# Altium PCB Main.PcbDoc
Units mm, origin at the board's own origin, x right, y up, seen from the top; angles counter-clockwise.
Board outline 99 x 125 mm, 4 copper layers (Top Layer, Layer 1, Layer 2, Bottom Layer), stack 0.603 mm thick; 11 components, 86 nets, 216 pads, 11 vias.
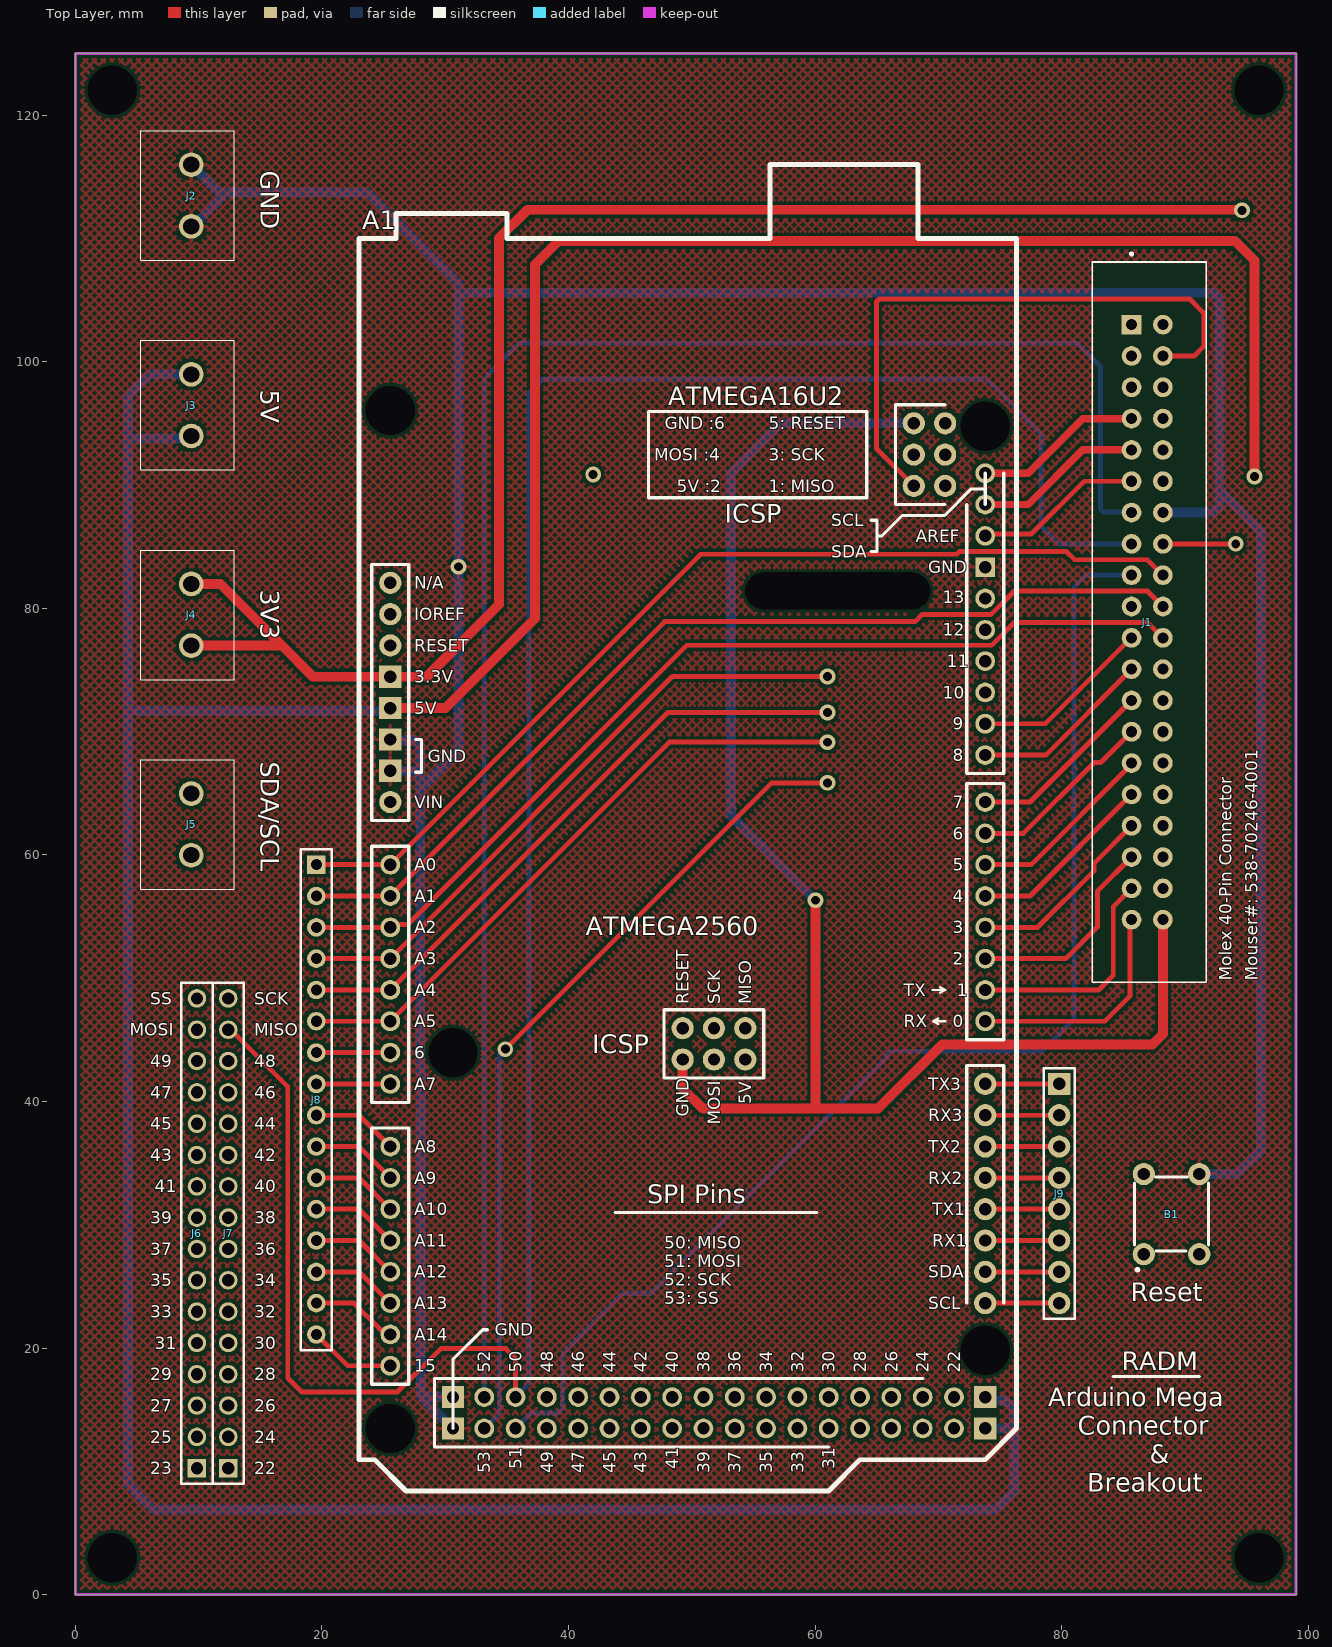
[diagram p0: Top Layer view]
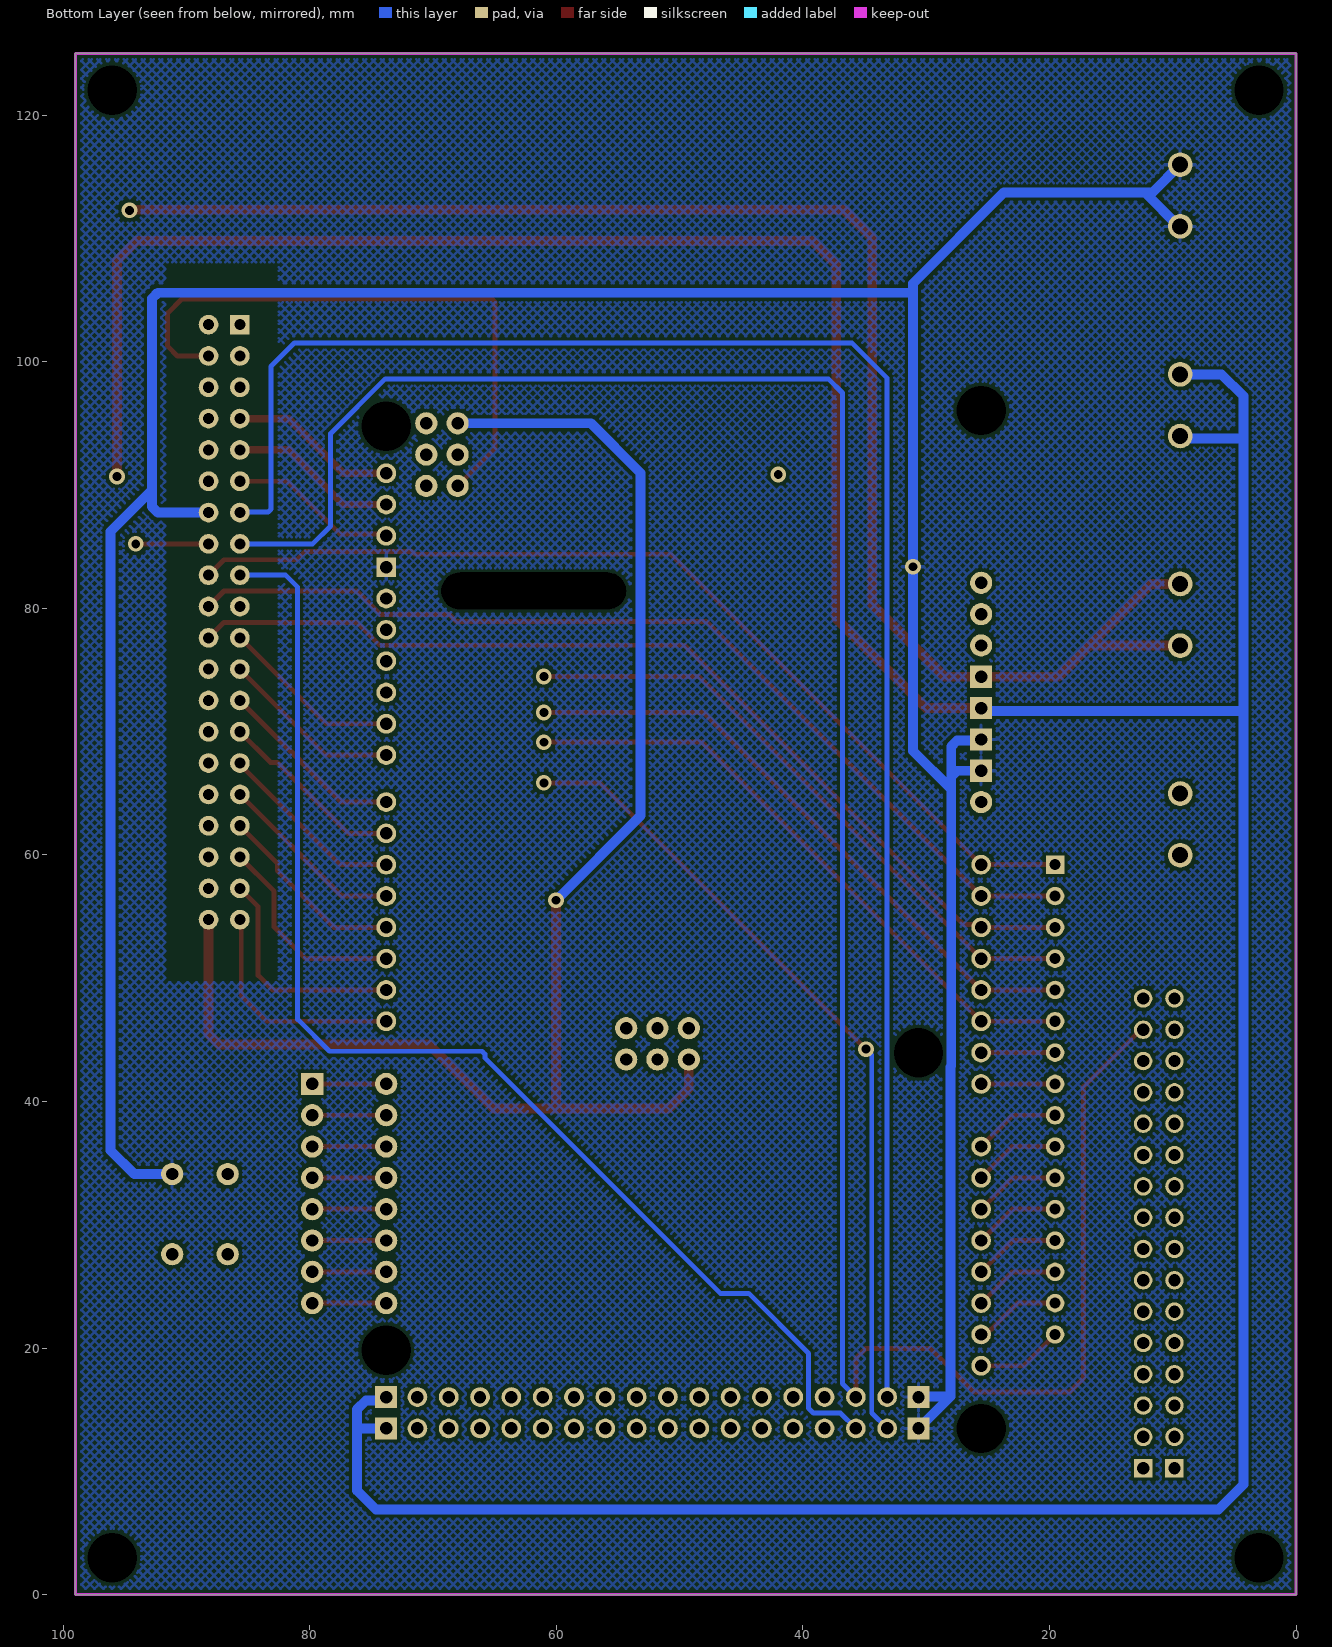
[diagram p1: Bottom Layer view, seen from below]
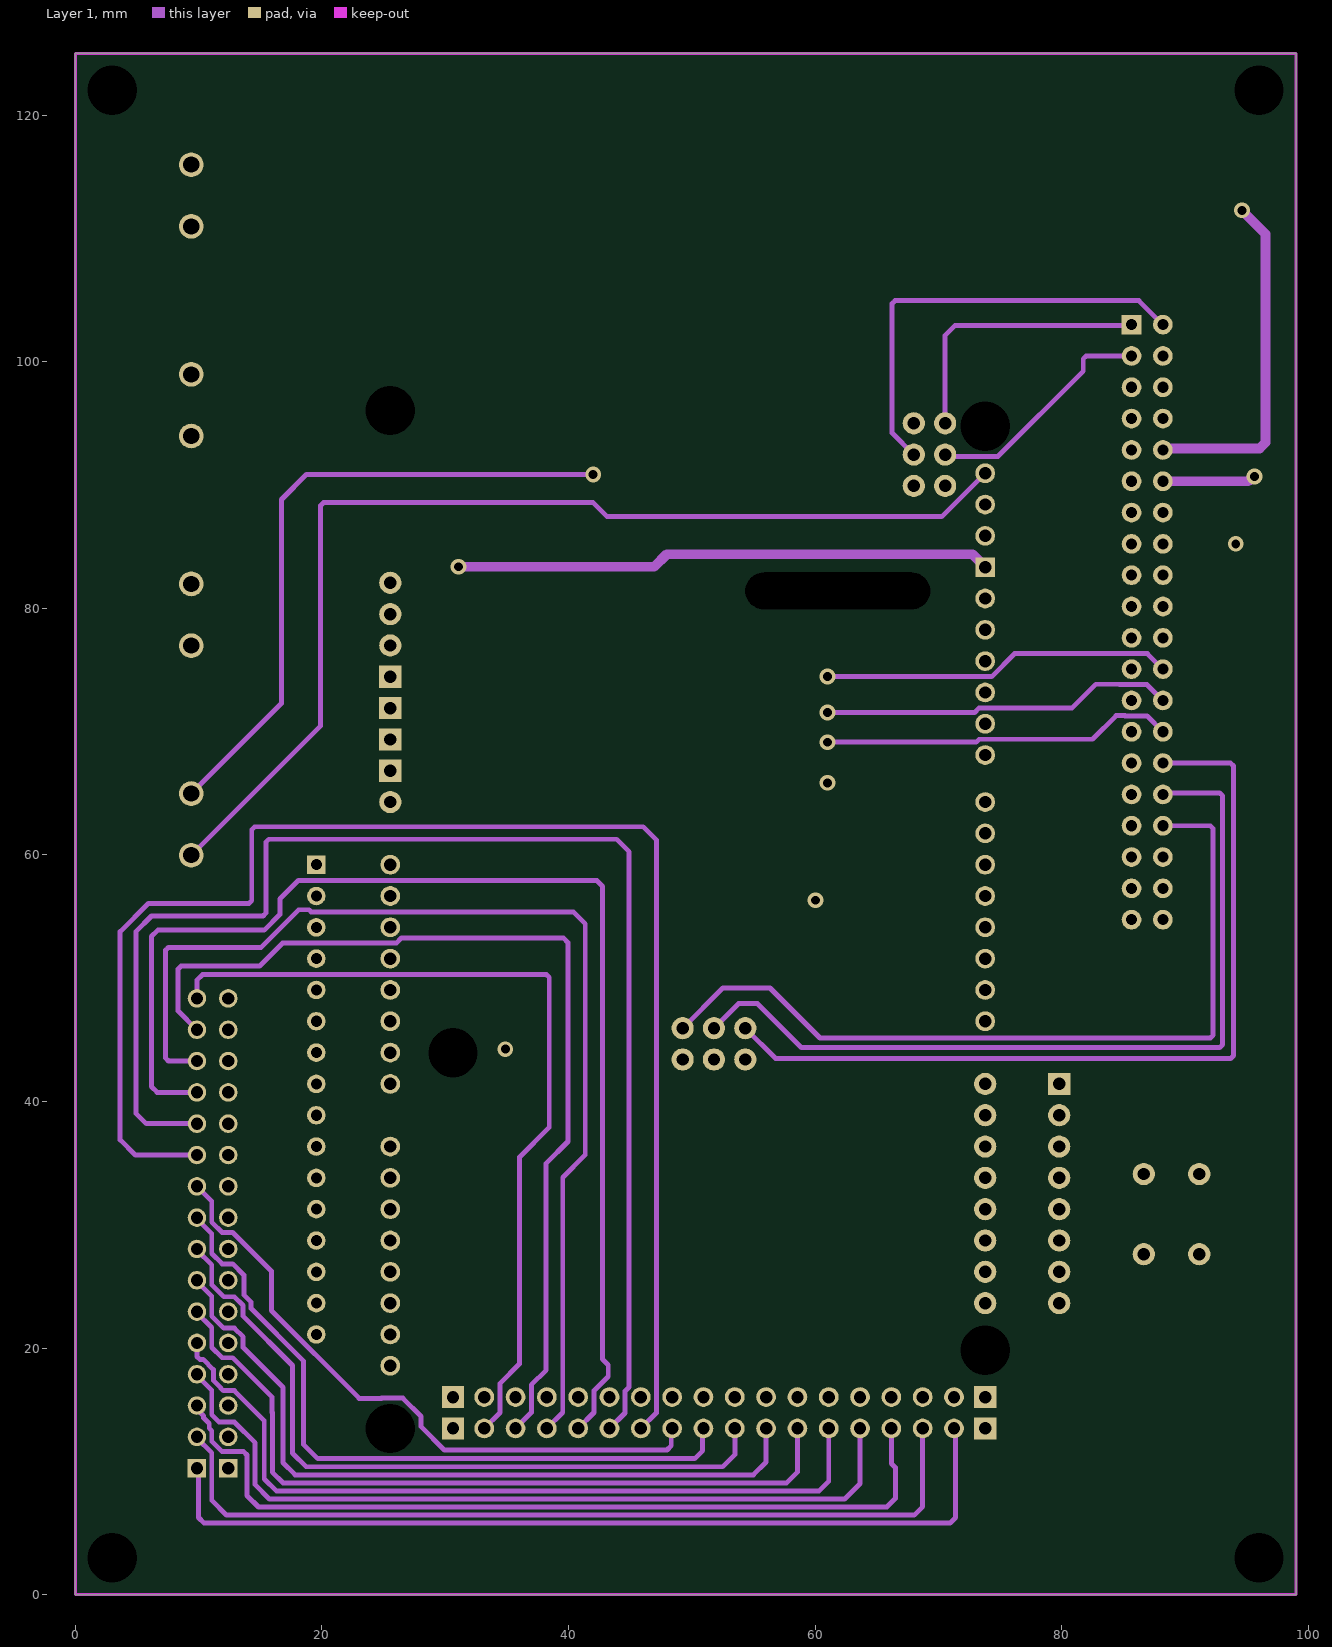
[diagram p2: Layer 1]
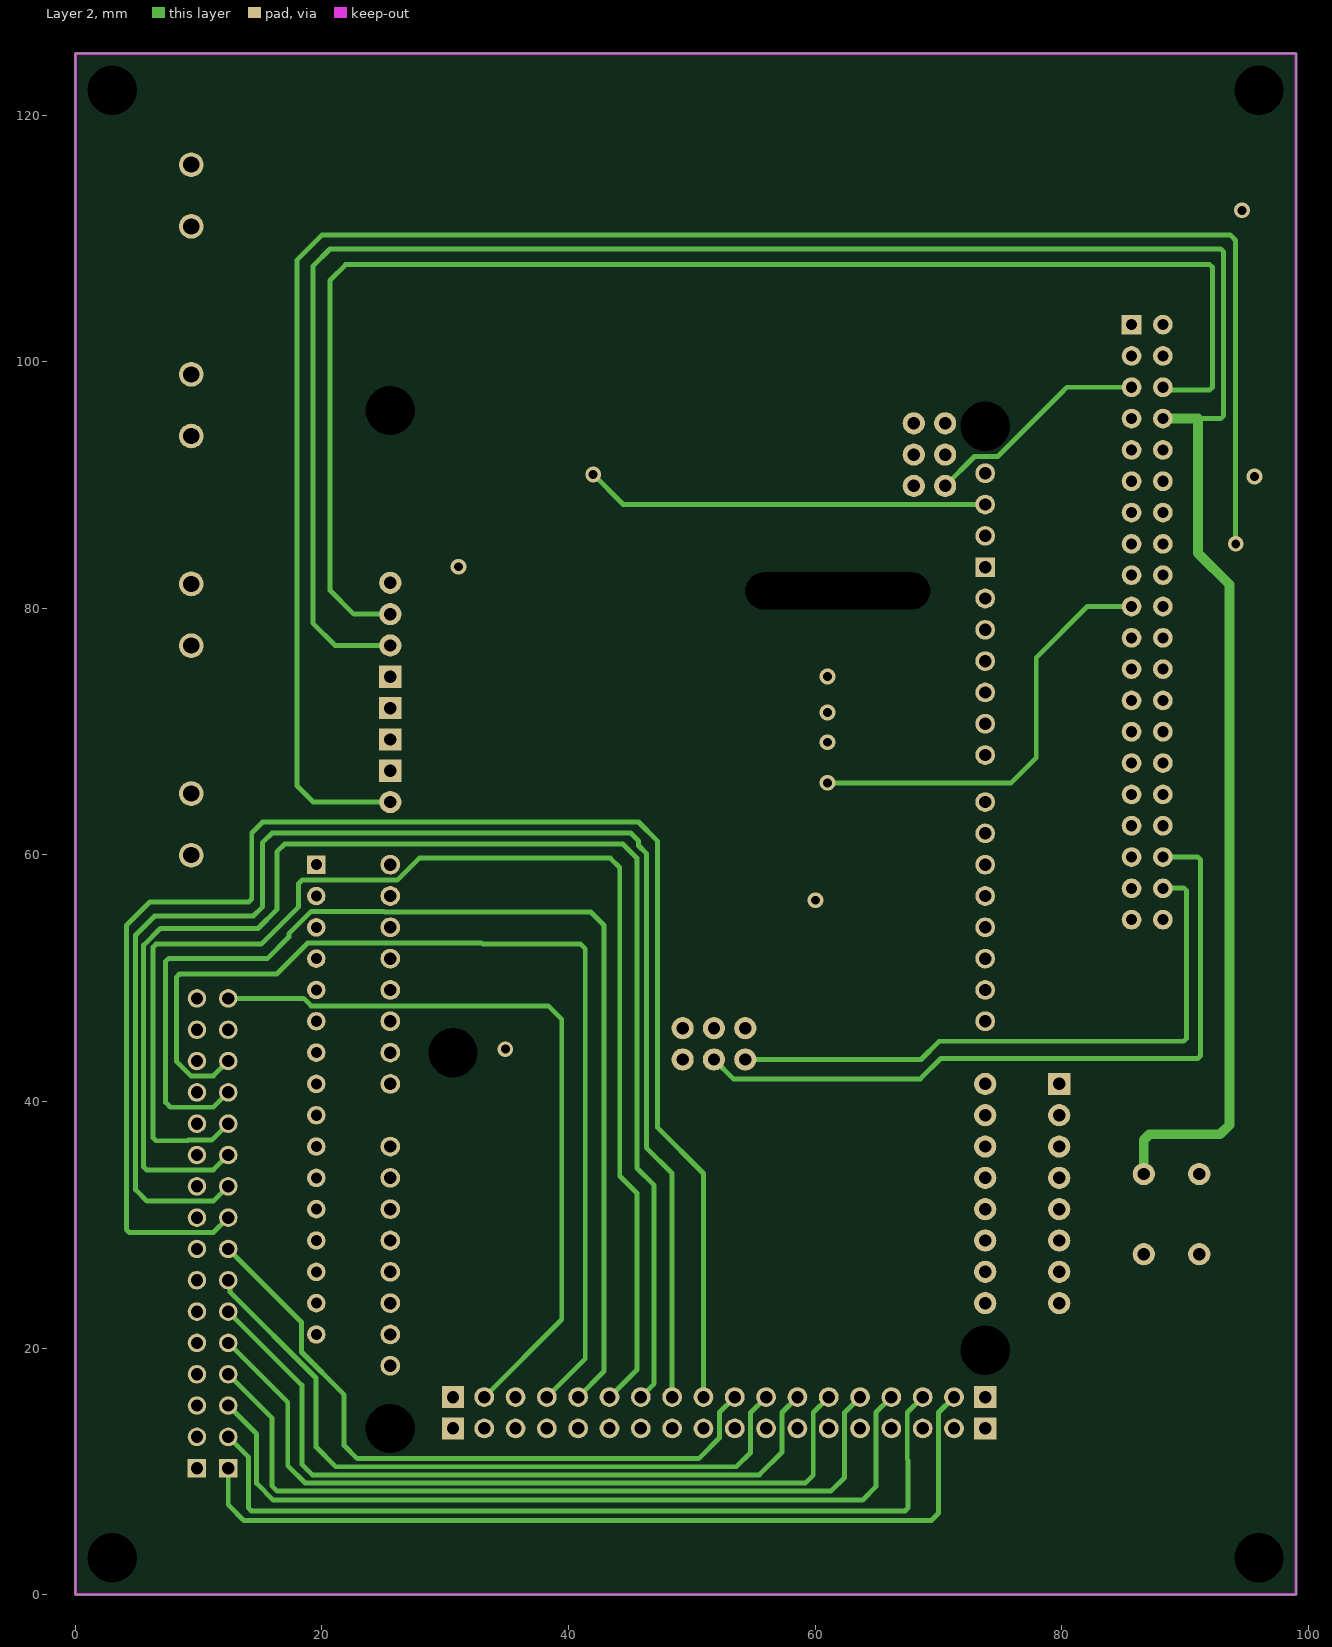
[diagram p3: Layer 2]

## Layer stack, top to bottom
Top Solder: solder mask 0.0102, Solder Resist, Dk 3.5
Top Layer: signal copper 0.0356
Dielectric 2: prepreg 0.0711, PP-006, Dk 4.1
Layer 1: signal copper 0.035
Dielectric 1: dielectric 0.32, FR-4, Dk 4.8
Layer 2: signal copper 0.035
Dielectric 3: prepreg 0.0711, PP-006, Dk 4.1
Bottom Layer: signal copper 0.0356
Bottom Solder: solder mask 0.0102, Solder Resist, Dk 3.5

## Board outline
0,0 0,125 99,125 99,0

## Design rules (kind name [scope] priority, off if disabled: settings)
Clearance Clearance_3 [(InComponent('J6') OR InComponent('J7'))] p1: gap=0.254 ignorepadtopadclearanceinfootprint=FALSE except(0: Arc-Hole Track-Hole SMDPad-Hole THPad-Hole Via-Hole Fill-Hole Poly-Hole Region-Hole Text-Hole)
Clearance Clearance_2 [All] p2: gap=0.254 ignorepadtopadclearanceinfootprint=FALSE except(0: Arc-Hole Track-Hole SMDPad-Hole THPad-Hole Via-Hole Fill-Hole Poly-Hole Region-Hole Text-Hole)
Clearance Clearance_1 [All] p3: gap=0.254 ignorepadtopadclearanceinfootprint=FALSE except(0: Arc-Hole Track-Hole SMDPad-Hole THPad-Hole Via-Hole Fill-Hole Poly-Hole Region-Hole Text-Hole)
Clearance [All] p4: gap=0.254 ignorepadtopadclearanceinfootprint=FALSE except(0: Arc-Hole Track-Hole SMDPad-Hole THPad-Hole Via-Hole Fill-Hole Poly-Hole Region-Hole Text-Hole)
PolygonConnect [All] p1: connectstyle=Relief reliefconductorwidth=0.254 reliefentries=4 polygonreliefangle="90 Angle" airgapwidth=0.254
RoutingVias [All] p1: holewidth=0.711 width=1.27 viastyle="Through Hole" minholewidth=0.711 minwidth=1.27 maxholewidth=0.711 maxwidth=1.27
SolderMaskExpansion [All] p1: expansion=0.102 istentingtop=FALSE
Width [All] p1: maxlimit=0.8 minlimit=0.4 preferedwidth=0.4
30 further rules are at their usual default settings.

## Components (designator, comment, footprint, x,y, rotation, side; value= is the part's Value field where it differs from the comment)
A1 "Arduino Mega R3" "Arduino Mega" 23,110 r0 top
B1 "Pushbutton" FSM4JH 88.9,30.861 r90 top
J1 "1-1761681-3" TE_1-1761681-3 85.659,103 r270 top
J2 "TB002-500-02BE" TB00250002BE 9.397,110.969 r90 top
J3 "TB002-500-02BE" TB00250002BE 9.397,93.969 r90 top
J4 "TB002-500-02BE" TB00250002BE 9.397,76.969 r90 top
J5 "TB002-500-02BE" TB00250002BE 9.397,59.969 r90 top
J6 "Header 16" HDR1X16#1 9.858,10.254 r90 top
J7 "Header 16" HDR1X16#1 12.398,10.254 r90 top
J8 "Header 16" HDR1X16#2 19.54,59.2 r270 top
J9 "Header 8" HDR1X8 79.79,41.42 r270 top

## Footprints (in the part's own frame and the unit in brackets; to place one, negate y for a bottom-side part, rotate by r counter-clockwise, add the part's x,y. Pads: shape width x height; smd on the part's side, far side on the other; paste and mask are expansions set on the pad)
"Arduino Mega" [mm]
  round 1.6 hole 1: 0(50.79,-63.5) 1(50.79,-60.96) 2(50.79,-58.42) 3(50.79,-55.88) 4(50.79,-53.34) 5(50.79,-50.8) 6(50.79,-48.26) 7(50.79,-45.72) 8(50.79,-41.91) 9(50.79,-39.37) 10(50.79,-36.83) 11(50.79,-34.29) 12(50.79,-31.75) 13(50.79,-29.21) 22(48.26,-93.98) 23(48.26,-96.52) 24(45.72,-93.98) 25(45.72,-96.52) 26(43.18,-93.98) 27(43.18,-96.52) 28(40.64,-93.98) 29(40.64,-96.52) 30(38.1,-93.98) 31(38.1,-96.52) 32(35.56,-93.98) 33(35.56,-96.52) 34(33.02,-93.98) 35(33.02,-96.52) 36(30.48,-93.98) 37(30.48,-96.52) 38(27.94,-93.98) 39(27.94,-96.52) 40(25.4,-93.98) 41(25.4,-96.52) 42(22.86,-93.98) 43(22.86,-96.52) 44(20.32,-93.98) 45(20.32,-96.52) 46(17.78,-93.98) 47(17.78,-96.52) 48(15.24,-93.98) 49(15.24,-96.52) 50(12.7,-93.98) 51(12.7,-96.52) 52(10.16,-93.98) 53(10.16,-96.52) A0(2.54,-50.8) A1(2.54,-53.34) A2(2.54,-55.88) A3(2.54,-58.42) A4(2.54,-60.96) A5(2.54,-63.5) A6(2.54,-66.04) A7(2.54,-68.58) A8(2.54,-73.66) A9(2.54,-76.2) A10(2.54,-78.74) A11(2.54,-81.28) A12(2.54,-83.82) A13(2.54,-86.36) A14(2.54,-88.9) A15(2.54,-91.44) AREF(50.79,-24.13) SCL(50.79,-19.05) SDA(50.79,-21.59)
  rect 1.8x1.8 hole 1: 3V3(2.54,-35.56) 5V1(2.54,-38.1) 5V2(50.8,-93.98) 5V3(50.8,-96.52) GND1(2.54,-40.64) GND2(2.54,-43.18) GND3(7.62,-93.98) GND4(7.62,-96.52)
  round 1.8 hole 1: 14TX3(50.79,-68.58) 15RX3(50.79,-71.12) 16TX2(50.79,-73.66) 17RX2(50.79,-76.2) 18TX1(50.79,-78.74) 19RX1(50.79,-81.28) 20SDA(50.79,-83.82) 21SCL(50.79,-86.36) 200(26.25,-66.6) 201(26.25,-64.06) 202(28.79,-66.6) 203(28.79,-64.06) 204(31.33,-66.6) 205(31.33,-64.06) 300(45,-15) 301(47.54,-15) 302(45,-17.54) 303(47.54,-17.54) 304(45,-20.08) 305(47.54,-20.08) IOREF(2.54,-30.48) NA(2.54,-27.94) RESET(2.54,-33.02) VIN(2.54,-45.72)
  round 1.524 hole 4 unplated: 211(2.54,-96.52) 211(2.54,-13.97) 211(7.62,-66.04) 211(50.8,-90.17) 211(50.8,-15.24)
  rect 1.6x1.6 hole 1: GND5(50.79,-26.67)
  oval 14x1.524 hole 3 slot 15 at 0 deg unplated: LED(38.83,-28.6)
  silkscreen extent 0,-101.6 53.33,6
FSM4JH [mm]
  round 1.8 hole 1: 1(-3.25,2.25) 2(3.25,2.25) 3(-3.25,-2.25) 4(3.25,-2.25)
  silkscreen extent -4.6,-3 3,3, body extent -3.82,-3 3.98,3, height 7.61
HDR1X8 [mm] "Connector; Header; 8 Position"
  rect 1.8x1.8 hole 1: 1(0,0)
  round 1.8 hole 1: 2(2.54,0) 3(5.08,0) 4(7.62,0) 5(10.16,0) 6(12.7,0) 7(15.24,0) 8(17.78,0)
  silkscreen extent -1.27,-1.27 19.05,1.27
HDR1X16#1 [mm] "Connector; Header; 16 Position"
  rect 1.5x1.5 hole 1: 1(0,0)
  round 1.5 hole 1: 2(2.54,0) 3(5.08,0) 4(7.62,0) 5(10.16,0) 6(12.7,0) 7(15.24,0) 8(17.78,0) 9(20.32,0) 10(22.86,0) 11(25.4,0) 12(27.94,0) 13(30.48,0) 14(33.02,0) 15(35.56,0) 16(38.1,0)
  silkscreen extent -1.27,-1.27 39.37,1.27
HDR1X16#2 [mm] "Connector; Header; 16 Position"
  rect 1.5x1.5 hole 0.9: 1(0,0)
  round 1.5 hole 0.9: 2(2.54,0) 3(5.08,0) 4(7.62,0) 5(10.16,0) 6(12.7,0) 7(15.24,0) 8(17.78,0) 9(20.32,0) 10(22.86,0) 11(25.4,0) 12(27.94,0) 13(30.48,0) 14(33.02,0) 15(35.56,0) 16(38.1,0)
  silkscreen extent -1.27,-1.27 39.37,1.27
TB00250002BE [mm]
  round 2 hole 1.3: 1(0,0) 2(5,0)
  silkscreen extent -2.75,-3.5 7.75,4.1, body extent -2.51,-4.08 7.99,3.52, height 9.99
TE_1-1761681-3 [mm]
  rect 1.6x1.6 hole 0.9: 1(0,0)
  round 1.6 hole 0.9: 2(0,2.54) 3(2.54,0) 4(2.54,2.54) 5(5.08,0) 6(5.08,2.54) 7(7.62,0) 8(7.62,2.54) 9(10.16,0) 10(10.16,2.54) 11(12.7,0) 12(12.7,2.54) 13(15.24,0) 14(15.24,2.54) 15(17.78,0) 16(17.78,2.54) 17(20.32,0) 18(20.32,2.54) 19(22.86,0) 20(22.86,2.54) 21(25.4,0) 22(25.4,2.54) 23(27.94,0) 24(27.94,2.54) 25(30.48,0) 26(30.48,2.54) 27(33.02,0) 28(33.02,2.54) 29(35.56,0) 30(35.56,2.54) 31(38.1,0) 32(38.1,2.54) 33(40.64,0) 34(40.64,2.54) 35(43.18,0) 36(43.18,2.54) 37(45.72,0) 38(45.72,2.54) 39(48.26,0) 40(48.26,2.54)
  silkscreen extent -5.83,-3.18 53.34,6.04

## Part data
A1: library part "Arduino Mega"
B1: "Switch", Manufacturer_Name="TE Connectivity", Manufacturer_Part_Number=FSM2JAH, Mouser Part Number=506-FSM2JAH, Datasheet Link=http://www.te.com/commerce/DocumentDelivery/DDEController?Action=showdoc&DocId=Customer+Drawing%7F1825910%7FC9%7Fpdf%7FEnglish%7FENG_CD_1825910_C9.pdf%7F1825910-3, Mouser Price/Stock=https://www.mouser.co.uk/ProductDetail/TE-Connectivity-PB/FSM2JAH?qs=Of7OaoM7rsH02ckr%252BGLHNA%3D%3D
J1: "Mouser#: 538-70246-4001 / Mfr#: 70246-4001 / MOLEX 40 Pin Connector / https://www.mouser.com/ProductDetail/Molex/70246-4001?qs=L7RdmAxh%252BcPPhnZkdmvwrw%3D%3D", Package=None, Availability=Unavailable, MP=1-1761681-3, Price=None
J2 J3 J4 J5: "Connector", Manufacturer_Name="CUI Devices", Mouser Part Number=490-TB002-500-02BE, Arrow Part Number=TB002-500-02BE, Arrow Price/Stock=https://www.arrow.com/en/products/tb002-500-02be/cui-devices?region=nac, Datasheet Link=https://eu.mouser.com/datasheet/2/670/tb002_500-1550579.pdf, Height=10.4mm, Manufacturer_Part_Number=TB002-500-02BE, Mouser Price/Stock=https://www.mouser.co.uk/ProductDetail/CUI-Devices/TB002-500-02BE?qs=vLWxofP3U2x9716kcgva%2Fw%3D%3D
J6 J7 J8: "Header, 16-Pin", LatestRevisionDate=17-Jul-2002, LatestRevisionNote="Re-released for DXP Platform.", Publisher="Altium Limited"
J9: "Header, 8-Pin", LatestRevisionDate=17-Jul-2002, LatestRevisionNote="Re-released for DXP Platform.", Publisher="Altium Limited"

## Free pads (board coordinates)
  round 1.524 hole 4 unplated: 2(3,3) 2(3,122) 2(96,3) 2(96,122)

## Via types
v1: diameter 1.27, hole 0.711, Top Layer to Bottom Layer, 11 vias

## Nets (pads, with @x,y where several pads share a name; then routed paths per layer and width w, separated by ;. In a path a pad name is that pad's centre, name@x,y a point inside that pad or via, vN(x,y) a via of type N, cw(c..) or ccw(c..) an arc to the next point about the centre after c; other vN are vias at no path point)
0: A1.0 J1.39 | length 18.7
  Top Layer w0.4: A1.0 83.489,46.5 85.55,48.561 J1.39@85.55,54.631
1: A1.1 J1.37 | length 18.5
  Top Layer w0.4: A1.1 82.988,49.04 84.175,50.227 84.175,55.797 J1.37
2: A1.2 J1.35 | length 17
  Top Layer w0.4: A1.2 80.314,51.58 82.883,54.149 82.883,57.044 J1.35
3: A1.3 J1.33 | length 15.6
  Top Layer w0.4: A1.3 78.028,54.12 82.629,58.721 82.629,59.33 J1.33
3V3: A1.3V3 J1.10 J4.1 J4.2 | length 157
  Top Layer w0.4: 16.676,76.969 16.716,77.009
  Top Layer w0.8: J4.1 16.676,76.969 ; J4.2 11.756,81.969 16.716,77.009 19.285,74.44 A1.3V3 28.498,74.44 34.369,80.311 34.369,110.029 36.655,112.315 94.568,112.315 v1(94.615,112.268)
  Layer 1 w0.4: J1.10 J1.10@88.323,92.964
  Layer 1 w0.8: J1.10@88.323,92.964 96.051,92.964 96.52,93.433 96.52,110.363 v1(94.615,112.268)
4: A1.4 J1.31 | length 15.3
  Top Layer w0.4: A1.4 77.419,56.66 J1.31
5: A1.5 J1.29 | length 15.3
  Top Layer w0.254: J1.29@85.659,67.339 J1.29
  Top Layer w0.4: A1.5 77.52,59.2 J1.29@85.659,67.339
5V: A1.5V1 A1.5V2 A1.5V3 J1.12 J3.1 J3.2 | length 334.2
  Top Layer w0.8: A1.5V1 30.022,71.9 37.29,79.168 37.29,107.87 39.195,109.775 94.051,109.775 95.631,108.195 v1(95.631,90.678)
  Layer 1 w0.8: J1.12 95.126,90.3 95.504,90.678 v1(95.631,90.678)
  Bottom Layer w0.8: J3.1 9.201,93.773 4.27,93.773 ; J3.2 6.037,98.969 4.27,97.202 4.27,93.773 ; A1.5V1 25.315,71.675 4.27,71.675 ; A1.5V3 76.054,13.48 76.152,13.382 ; A1.5V2 74.066,15.754 75.431,15.754 76.152,15.033 76.152,13.382 ; 4.27,71.675 4.27,8.937 6.302,6.905 74.628,6.905 76.152,8.429 76.152,13.382 ; 4.27,71.675 4.27,93.773
6: A1.6 J1.27 | length 15.3
  Top Layer w0.4: A1.6 76.885,61.74 82.629,67.484 83.163,67.484 J1.27
7: A1.7 J1.25 | length 15.3
  Top Layer w0.4: A1.7 77.419,64.28 J1.25
8: A1.8 J1.23 | length 14.8
  Top Layer w0.4: A1.8 78.689,68.09 J1.23
9: A1.9 J1.21 | length 14.8
  Top Layer w0.254: J1.21@85.633,77.6 J1.21
  Top Layer w0.4: A1.9 78.663,70.63 J1.21@85.633,77.6
14: A1.14TX3 J9.1 | length 6
  Top Layer w0.4: A1.14TX3 J9.1
15: A1.15RX3 J9.2 | length 6
  Top Layer w0.4: A1.15RX3 J9.2
16: A1.16TX2 J9.3 | length 6
  Top Layer w0.4: A1.16TX2 J9.3
17: A1.17RX2 J9.4 | length 6
  Top Layer w0.4: A1.17RX2 J9.4
18: A1.18TX1 J9.5 | length 6
  Top Layer w0.4: A1.18TX1 J9.5
19: A1.19RX1 J9.6 | length 6
  Top Layer w0.4: A1.19RX1 J9.6
20: A1.20SDA J9.7 | length 6
  Top Layer w0.4: A1.20SDA J9.7
21: A1.21SCL J9.8 | length 6
  Top Layer w0.4: A1.21SCL J9.8
22: A1.22 J7.1 | length 71.3
  Layer 2 w0.4: J7.1 12.398,7.286 13.668,6.016 69.421,6.016 70.006,6.601 70.006,14.766 A1.22
23: A1.23 J6.1 | length 73.1
  Layer 1 w0.4: J6.1 9.985,10.127 9.985,6.25 10.441,5.794 70.939,5.794 71.395,6.25 71.395,13.345 A1.23
24: A1.24 J7.2 | length 69.7
  Layer 2 w0.4: J7.2 14.049,11.143 14.049,7.012 14.283,6.778 67.282,6.778 67.516,7.012 67.516,10.892 67.466,10.942 67.466,14.766 A1.24
25: A1.25 J6.2 | length 70.4
  Layer 1 w0.4: J6.2 9.858,12.706 11.062,11.502 11.062,7.644 12.258,6.448 68.029,6.448 68.72,7.139 A1.25
26: A1.26 J7.3 | length 66.3
  Layer 2 w0.4: J7.3 14.703,13.029 14.703,9.025 16.061,7.667 63.833,7.667 64.926,8.76 64.926,14.766 A1.26
27: A1.27 J6.3 | length 69.1
  Layer 1 w0.4: J6.3 9.858,15.036 10.408,14.486 10.408,14.32 10.855,13.873 10.855,13.5 11.062,13.293 11.062,12.427 11.899,11.59 13.654,11.59 13.922,11.322 13.922,8.028 14.848,7.102 65.809,7.102 66.5,7.793 66.5,10.314 66.18,10.634 A1.27
28: A1.28 J7.4 | length 64.6
  Layer 2 w0.4: J7.4 15.954,14.318 15.954,8.79 16.334,8.41 61.294,8.41 62.386,9.502 62.386,14.766 A1.28
29: A1.29 J6.4 | length 66.2
  Layer 1 w0.4: J6.4 9.858,17.786 11.062,16.582 11.062,14.591 11.509,14.143 11.655,13.998 12.897,13.998 14.576,12.319 14.576,8.918 15.738,7.756 62.398,7.756 63.64,8.998 A1.29
30: A1.30 J7.5 | length 62.3
  Layer 2 w0.4: J7.5 17.224,15.588 17.224,10.461 18.621,9.064 59.231,9.064 59.846,9.679 59.846,14.766 A1.30
31: A1.31 J6.5 | length 64.8
  Layer 1 w0.4: J6.5 9.858,19.312 10.092,19.078 10.357,19.078 11.194,18.241 11.194,17.375 11.763,16.806 11.763,16.791 12.016,16.538 12.897,16.538 15.319,14.116 15.319,9.38 16.289,8.41 60.32,8.41 61.1,9.19 A1.31
32: A1.32 J7.6 | length 59.9
  Layer 2 w0.4: J7.6 18.367,16.985 18.367,10.568 19.217,9.718 55.47,9.718 57.306,11.554 57.306,14.766 A1.32
33: A1.33 J6.6 | length 62.9
  Layer 1 w0.4: J6.6 9.858,22.866 11.062,21.662 11.062,20.047 11.899,19.21 12.765,19.21 15.954,16.021 15.954,14.779 15.973,14.76 15.973,9.933 16.842,9.064 57.691,9.064 58.56,9.933 A1.33
34: A1.34 J7.7 | length 57.9
  Layer 2 w0.4: J7.7 12.548,25.344 12.548,24.535 19.51,17.573 19.51,11.985 21.123,10.372 53.611,10.372 54.766,11.527 54.766,14.766 A1.34
35: A1.35 J6.7 | length 60.9
  Layer 1 w0.4: J6.7 9.858,25.406 11.062,24.202 11.062,22.587 12.031,21.618 12.897,21.618 13.602,20.913 13.602,20.047 16.843,16.806 16.843,10.695 17.82,9.718 54.982,9.718 56.02,10.756 A1.35
36: A1.36 J7.8 | length 55.2
  Layer 2 w0.4: J7.8 18.336,22.096 18.336,19.672 21.796,16.212 21.796,12.092 22.862,11.026 50.555,11.026 52.226,12.697 52.226,14.766 A1.36
37: A1.37 J6.8 | length 59.1
  Layer 1 w0.4: J6.8 9.858,27.946 11.062,26.742 11.062,25.127 12.031,24.158 12.897,24.158 13.602,23.453 13.602,22.587 17.605,18.584 17.605,11.477 18.71,10.372 52.503,10.372 53.48,11.349 A1.37
38: A1.38 J7.9 | length 130.5
  Layer 2 w0.4: J7.9 11.194,29.37 4.377,29.37 4.143,29.604 4.143,54.276 6.048,56.181 14.069,56.181 14.303,56.415 14.303,61.769 15.192,62.658 45.672,62.658 47.196,61.134 47.196,37.893 50.94,34.149 A1.38
39: A1.39 J6.9 | length 57.4
  Layer 1 w0.4: J6.9 9.858,30.486 11.062,29.282 11.062,27.667 11.899,26.83 12.765,26.83 13.668,25.927 13.668,24.312 14.256,23.724 14.256,23.208 18.494,18.97 18.494,12.188 19.656,11.026 50.225,11.026 50.879,11.68 50.879,13.419 A1.39
40: A1.40 J7.10 | length 122.8
  Layer 2 w0.4: J7.10 11.194,31.91 5.808,31.91 4.886,32.832 4.886,53.495 6.429,55.038 14.43,55.038 15.192,55.8 15.192,61.007 15.954,61.769 45.037,61.769 45.672,61.134 45.672,60.753 46.307,60.118 46.307,36.242 48.4,34.149 A1.40
41: A1.41 J6.10 | length 52.3
  Layer 1 w0.4: J6.10 11.062,31.91 11.062,30.207 11.899,29.37 12.765,29.37 15.903,26.232 15.903,23.034 23.015,15.922 24.832,15.922 24.844,15.934 26.556,15.934 28.044,14.446 28.044,13.614 29.927,11.731 47.978,11.731 48.327,12.08 48.327,13.407 A1.41
42: A1.42 J7.11 | length 116.8
  Layer 2 w0.4: J7.11 11.194,34.45 5.774,34.45 5.54,34.684 5.54,52.681 6.881,54.022 14.811,54.022 16.335,55.546 16.335,60.245 16.97,60.88 44.402,60.88 45.545,59.737 45.545,34.591 46.942,33.194 46.942,17.102 A1.42
43: A1.43 J6.11 | length 123
  Layer 1 w0.4: J6.11@9.858,35.356 J6.11 4.858,35.654 3.635,36.877 3.635,53.768 5.921,56.054 14.069,56.054 14.303,56.288 14.303,62.043 14.537,62.277 46.053,62.277 47.114,61.216 47.114,14.734 A1.43
44: A1.44 J7.12 | length 109
  Layer 2 w0.4: J7.12 11.062,36.858 9.183,36.858 9.133,36.808 6.536,36.808 6.302,37.042 6.302,52.518 6.536,52.752 15.065,52.752 18.113,55.8 18.113,57.679 18.38,57.946 26.101,57.946 27.892,59.737 43.386,59.737 44.148,58.975 44.148,33.956 45.545,32.559 45.545,18.245 A1.44
45: A1.45 J6.12 | length 114.7
  Layer 1 w0.4: J6.12 5.747,38.194 4.905,39.036 4.905,53.768 6.175,55.038 15.212,55.038 15.446,55.272 15.446,61.027 15.68,61.261 43.894,61.261 44.91,60.245 44.91,16.843 44.574,16.507 44.574,14.734 A1.45 A1.45@43.32,13.805
46: A1.46 J7.13 | length 94.2
  Layer 2 w0.4: J7.13 11.194,39.53 7.713,39.53 7.318,39.925 7.318,51.355 7.572,51.609 15.593,51.609 17.317,53.333 17.317,53.6 19.136,55.419 25.008,55.419 25.053,55.374 41.78,55.374 42.878,54.276 42.878,18.118 A1.46
47: A1.47 J6.13 | length 100.6
  Layer 1 w0.4: J6.13 6.636,40.734 6.175,41.195 6.175,53.387 6.683,53.895 15.319,53.895 16.591,55.167 16.591,56.43 18.075,57.914 42.288,57.914 42.751,57.451 42.751,19.097 43.22,18.628 43.22,17.694 42.066,16.539 42.066,14.766 A1.47
48: A1.48 J7.14 | length 84.2
  Layer 2 w0.4: J7.14 11.194,42.07 9.359,42.07 8.207,43.222 8.207,50.105 8.441,50.339 16.335,50.339 18.83,52.834 32.956,52.834 33.038,52.752 40.973,52.752 41.354,52.371 41.354,19.134 A1.48
49: A1.49 J6.14 | length 89.5
  Layer 1 w0.4: J6.14 7.552,43.274 7.318,43.508 7.318,52.264 7.552,52.498 15.065,52.498 18.113,55.546 18.951,55.546 19.123,55.374 40.383,55.374 41.354,54.403 41.354,35.661 39.526,33.833 39.526,14.766 A1.49
201: A1.201 J1.34 | length 67.1
  Layer 1 w0.4: A1.201 52.506,49.196 56.34,49.196 60.39,45.146 92.047,45.146 92.281,45.38 92.281,62.126 92.047,62.36 J1.34
202: A1.202 J1.36 | length 59.9
  Layer 2 w0.4: A1.202 53.36,41.83 68.532,41.83 70.183,43.481 91.031,43.481 91.265,43.715 91.265,59.586 91.031,59.82 J1.36
203: A1.203 J1.32 | length 68.8
  Layer 1 w0.4: A1.203 53.776,47.926 55.324,47.926 58.88,44.37 92.809,44.37 93.043,44.604 93.043,64.779 92.809,65.013 88.312,65.013 J1.32
204: A1.204 J1.38 | length 50.5
  Layer 2 w0.4: A1.204 68.578,43.4 70.056,44.878 89.888,44.878 90.122,45.112 90.122,57.09 89.888,57.324 88.243,57.324 J1.38
205: A1.205 J1.30 | length 70
  Layer 1 w0.4: A1.205 56.789,43.481 93.698,43.481 93.932,43.715 93.932,67.206 93.698,67.44 J1.30
301: A1.301 J1.1 | length 22.6
  Layer 1 w0.4: A1.301 70.54,102.131 71.326,102.917 85.576,102.917 J1.1
302: A1.302 J1.2 | length 35.8
  Layer 1 w0.4: A1.302 66.246,94.214 66.246,104.715 66.48,104.949 86.249,104.949 J1.2
303: A1.303 J1.3 | length 19.1
  Layer 1 w0.4: A1.303 70.694,92.306 74.816,92.306 81.74,99.23 81.74,100.226 81.974,100.46 J1.3
304: A1.304 J1.4 | length 49.6
  Top Layer w0.4: A1.304 64.976,92.944 64.976,104.842 65.21,105.076 90.376,105.076 91.519,103.933 91.519,101.246 90.733,100.46 J1.4
305: A1.305 J1.5 | length 18.4
  Layer 2 w0.4: A1.305 72.924,92.304 74.814,92.304 80.089,97.579 80.089,97.603 80.406,97.92 J1.5
A0: A1.A0 J1.18 J8.1 | length 80
  Top Layer w0.4: J8.1 A1.A0 50.715,84.375 71.487,84.375 71.696,84.584 80.388,84.584 81.038,83.934 86.944,83.934 J1.18
A1: A1.A1 J1.20 J8.2 | length 79.4
  Top Layer w0.4: J8.2 A1.A1 47.794,78.914 68.107,78.914 68.697,79.504 74.277,79.504 76.167,81.394 86.944,81.394 J1.20
A2: A1.A2 J1.22 J8.3 | length 79.4
  Top Layer w0.4: J8.3 A1.A2 25.76,54.34 26.94,54.34 49.596,76.996 74.309,76.996 76.167,78.854 86.944,78.854 J1.22
A3: A1.A3 J1.24 J8.4 | length 79.9
  Top Layer w0.4: J8.4 A1.A3 48.429,74.469 v1(61,74.469) v1@61.42,74.469
  Layer 1 w0.4: v1(61,74.469) 61.013,74.456 74.309,74.456 76.167,76.314 86.944,76.314 J1.24
A4: A1.A4 J1.26 J8.5 | length 79.5
  Top Layer w0.4: J8.5 A1.A4 48.048,71.548 v1(61,71.548)
  Layer 1 w0.4: v1(61,71.548) 72.935,71.548 73.303,71.916 80.838,71.916 82.756,73.834 84.658,73.834 84.686,73.806 86.913,73.806 J1.26
A5: A1.A5 J1.28 J8.6 | length 79.5
  Top Layer w0.4: J8.6 A1.A5 48.175,69.135 v1(61,69.135)
  Layer 1 w0.4: v1(61,69.135) 73.062,69.135 73.303,69.376 82.489,69.376 84.407,71.294 85.111,71.294 85.139,71.266 86.913,71.266 J1.28
A6: A1.A6 J8.7 | length 6
  Top Layer w0.4: J8.7 A1.A6
A7: A1.A7 J8.8 | length 6
  Top Layer w0.4: J8.8 A1.A7
A8: A1.A8 J8.9 | length 7.1
  Top Layer w0.4: J8.9 23,38.88 A1.A8
A9: A1.A9 J8.10 | length 7.1
  Top Layer w0.4: J8.10 22.991,36.34 23.216,36.116 23.225,36.116 A1.A9
A10: A1.A10 J8.11 | length 7.1
  Top Layer w0.4: J8.11 23,33.8 A1.A10
A11: A1.A11 J8.12 | length 7.1
  Top Layer w0.4: J8.12 23,31.26 A1.A11
A12: A1.A12 J8.13 | length 7.1
  Top Layer w0.4: J8.13 23,28.72 A1.A12
A13: A1.A13 J8.14 | length 7.1
  Top Layer w0.4: J8.14 23,26.18 A1.A13
A14: J8.15 | length 7.1
  Top Layer w0.4: J8.15 22.587,23.64 24.673,21.554 24.707,21.554 25.161,21.1 25.54,21.1
A15: J8.16 | length 7.1
  Top Layer w0.4: J8.16 22.08,18.56 25.54,18.56
AREF: A1.AREF J1.11 | length 13.7
  Top Layer w0.4: A1.AREF 73.946,86.026 77.549,86.026 81.823,90.3 J1.11
GND: A1.GND1 A1.GND2 A1.GND3 A1.GND4 A1.GND5 B1.4 J1.14 J2.1 J2.2 | length 324.2
  Layer 1 w0.8: v1(31.067,83.359) 46.942,83.359 47.958,84.375 72.745,84.375 A1.GND5
  Bottom Layer w0.8: J2.1 9.51,110.969 12.253,113.712 ; J2.2 11.654,113.712 12.253,113.712 ; A1.GND2 27.497,66.82 27.966,66.351 ; A1.GND1 25.638,69.262 27.497,69.262 27.966,68.793 27.966,66.351 ; A1.GND4 28.019,16.081 ; A1.GND3 30.559,16.081 28.019,16.081 ; J1.14 92.32,87.76 92.789,88.229 92.789,89.583 ; B1.4 94.221,34.111 96.139,36.029 96.139,86.233 92.789,89.583 ; 12.253,113.712 23.701,113.712 31.067,106.346 31.067,105.584 ; 27.966,65.325 27.966,42.861 28.019,42.808 28.019,16.081 ; 27.966,65.325 27.966,66.351 ; 27.966,65.325 31.067,68.426 v1(31.067,83.359) 31.067,105.584 ; 31.067,105.584 92.32,105.584 92.789,105.115 92.789,89.583
"ICSP GND": A1.200 A1.300 J1.40 | length 124.7
  Top Layer w0.8: A1.200 49.25,41.046 50.879,39.417 60.023,39.417 ; v1(60.023,56.308) 60.023,39.417 ; J1.40 88.199,45.475 87.348,44.624 70.31,44.624 65.103,39.417 60.023,39.417
  Bottom Layer w0.8: v1(60.023,56.308) 53.165,63.166 53.165,90.979 57.186,95 A1.300
IOREF: A1.IOREF J1.6 | length 116.9
  Layer 2 w0.4: A1.IOREF 22.587,79.52 20.653,81.454 20.653,106.6 21.923,107.87 92,107.87 92.234,107.636 92.234,97.944 92,97.71 88.408,97.71 J1.6
MISO: A1.50 J1.15 J7.15 | length 195.4
  Top Layer w0.4: J7.15 12.605,45.814 17.224,41.195 17.224,17.573 18.367,16.43 26.114,16.43 29.631,19.947 34.916,19.947 35.7,19.163 A1.50
  Bottom Layer w0.4: A1.50 36.782,17.102 36.782,97.456 37.925,98.599 73.866,98.599 78.311,94.154 78.311,86.661 79.752,85.22 J1.15
MOSI: A1.51 J1.17 J6.15 | length 181.5
  Layer 1 w0.4: J6.15 8.334,47.338 8.334,50.74 8.568,50.974 14.938,50.974 16.798,52.834 26.027,52.834 26.453,53.26 39.576,53.26 39.957,52.879 39.957,36.75 38.179,34.972 38.179,18.208 36.986,17.015 36.986,14.766 A1.51
  Bottom Layer w0.4: A1.51 36.954,14.734 39.15,14.734 39.556,15.14 39.556,15.471 39.526,15.501 39.526,19.555 44.402,24.431 46.688,24.431 65.786,43.529 65.786,43.835 66.02,44.069 78.391,44.069 80.978,46.656 80.978,81.708 81.95,82.68 J1.17
RESET: A1.RESET B1.2 J1.8 | length 197.4
  Layer 2 w0.4: A1.RESET 21.063,76.98 19.256,78.787 19.256,107.743 20.653,109.14 92.889,109.14 93.123,108.906 93.123,95.614 92.889,95.38 91.059,95.38
  Layer 2 w0.8: B1.2 86.65,36.866 87.122,37.338 92.837,37.338 93.599,38.1 93.599,81.915 91.059,84.455 91.059,95.38 J1.8
SCK: A1.52 J1.13 J7.16 | length 209.8
  Layer 2 w0.4: J7.16 18.523,48.354 19.123,47.754 38.351,47.754 39.449,46.656 39.449,22.309 A1.52
  Bottom Layer w0.4: A1.52 33.16,98.66 36.02,101.52 81.232,101.52 83.137,99.615 83.137,88.038 83.371,87.804 85.614,87.804 J1.13
SCL: A1.SCL J1.7 J5.1 | length 102.3
  Top Layer w0.6: A1.SCL 77.266,90.95 81.696,95.38 J1.7
  Layer 1 w0.4: J5.1 19.891,70.463 19.891,88.332 20.125,88.566 41.989,88.566 43.132,87.423 70.263,87.423 A1.SCL
SDA: A1.SDA J1.9 J5.2 | length 99.5
  Top Layer w0.6: A1.SDA 77.266,88.41 81.696,92.84 J1.9
  Layer 1 w0.4: J5.2 16.716,72.288 16.716,88.82 18.748,90.852 v1(41.989,90.852)
  Layer 2 w0.4: v1(41.989,90.852) 44.431,88.41 A1.SDA
SS: A1.53 J1.19 J6.16 | length 171
  Top Layer w0.4: v1(34.877,44.243) 56.467,65.833 v1(61,65.833)
  Layer 1 w0.4: J6.16 9.858,49.831 10.321,50.294 38.199,50.294 38.433,50.06 38.433,37.893 36.02,35.48 36.02,18.716 34.446,17.142 34.446,14.766 A1.53
  Layer 2 w0.4: v1(61,65.833) 75.898,65.833 77.93,67.865 77.93,75.993 82.077,80.14 J1.19
  Bottom Layer w0.4: A1.53 34.414,14.734 34.414,43.78 v1(34.877,44.243)
VIN: A1.VIN J1.16 | length 158.7
  Top Layer w0.4: J1.16 J1.16 94.106,85.218 v1(94.107,85.217)
  Layer 2 w0.4: A1.VIN 19.285,64.28 17.986,65.579 17.986,108.251 20.018,110.283 93.651,110.283 94.107,109.827 v1(94.107,85.217) ; J1.16 J1.16@88.37,85.391
pads on no net: A1.10 A1.11 A1.12 A1.13 A1.211 A1.A14 A1.A15 A1.LED A1.NA B1.1 B1.3

## Polygon pours and split planes (outlines as drawn)
GND on Bottom Layer "GND_L04_P000" (hatched 45Degree grid 0.508 track 0.203, pour order 0): 0,125 99,125 99,0 0,0
GND on Top Layer "GND_L01_P001" (hatched 45Degree grid 0.508 track 0.203, pour order 1): 0,0 99,0 99,125 0,125

## Keep-outs
Keep-Out Layer:
  the board outline again, w0.254

## Other copper
Top Layer:
  pour cut-out: 82.5,49.65 91.7,49.65 91.7,108.05 82.5,108.05
Bottom Layer:
  pour cut-out: 82.5,108.05 91.7,108.05 91.7,49.65 82.5,49.65

## Silkscreen, mask and mechanical layers (free items; w line width, h text height)
Top Overlay:
  lines w0.254: 84.15,17.7 91.15,17.7
  text "GND" at 15.054,115.5 h1.52 r270
  text "5V" at 15.054,97.739 h1.52 r270
  text "3V3" at 15.054,81.5 h1.52 r270
  text "SDA/SCL" at 15.054,67.547 h1.52 r270
  text "Molex 40-Pin Connector" at 93.8,49.796 h1 r90
  text "Mouser#: 538-70246-4001" at 95.9,49.796 h1 r90
  text "SS" at 6.092,47.854 h1
  text "SCK" at 14.498,47.854 h1
  text "MOSI" at 4.426,45.314 h1
  text "MISO" at 14.498,45.314 h1
  text "49" at 6.092,42.774 h1
  text "48" at 14.498,42.774 h1
  text "47" at 6.092,40.234 h1
  text "46" at 14.498,40.234 h1
  text "45" at 6.092,37.694 h1
  text "44" at 14.498,37.694 h1
  text "43" at 6.092,35.154 h1
  text "42" at 14.498,35.154 h1
  text "41" at 6.425,32.614 h1
  text "40" at 14.498,32.614 h1
  text "39" at 6.092,30.074 h1
  text "38" at 14.498,30.074 h1
  text "37" at 6.092,27.534 h1
  text "36" at 14.498,27.534 h1
  text "35" at 6.092,24.994 h1
  text "34" at 14.498,24.994 h1
  text "Reset" at 85.599,23.804 h1.52
  text "33" at 6.092,22.454 h1
  text "32" at 14.498,22.454 h1
  text "31" at 6.425,19.914 h1
  text "30" at 14.498,19.914 h1
  text "RADM" at 84.857,18.188 h1.52
  text "29" at 6.092,17.374 h1
  text "28" at 14.498,17.374 h1
  text "Arduino Mega" at 78.89,15.275 h1.52
  text "27" at 6.092,14.834 h1
  text "26" at 14.498,14.834 h1
  text "Connector" at 81.302,12.963 h1.52
  text "25" at 6.092,12.294 h1
  text "24" at 14.498,12.294 h1
  text "&" at 87.142,10.65 h1.52
  text "23" at 6.092,9.754 h1
  text "22" at 14.498,9.754 h1
  text "Breakout" at 82.064,8.338 h1.52

## Text inside footprints (layer, text, board x,y; h text height)
A1: Top Overlay "GND" at 49.75,38.775 h1 r90; Top Overlay "MOSI" at 52.29,38.108 h1 r90; Top Overlay "5V" at 54.83,39.774 h1 r90; Top Overlay "RESET" at 49.75,47.9 h1 r90; Top Overlay "SCK" at 52.29,47.9 h1 r90; Top Overlay "MISO" at 54.83,47.9 h1 r90; Top Overlay "GND" at 33.995,20.981 h1; Top Overlay "N/A" at 27.5,81.56 h1; Top Overlay "31" at 61.6,10.187 h1 r90; Top Overlay "33" at 59.06,9.854 h1 r90; Top Overlay "35" at 56.52,9.854 h1 r90; Top Overlay "37" at 53.98,9.854 h1 r90; Top Overlay "39" at 51.44,9.854 h1 r90; Top Overlay "41" at 48.9,10.187 h1 r90; Top Overlay "43" at 46.36,9.854 h1 r90; Top Overlay "45" at 43.82,9.854 h1 r90; Top Overlay "47" at 41.28,9.854 h1 r90; Top Overlay "49" at 38.74,9.854 h1 r90; Top Overlay "51" at 36.2,10.187 h1 r90; Top Overlay "53" at 33.66,9.854 h1 r90; Top Overlay "22" at 71.76,17.98 h1 r90; Top Overlay "24" at 69.22,17.98 h1 r90; Top Overlay "26" at 66.68,17.98 h1 r90; Top Overlay "28" at 64.14,17.98 h1 r90; Top Overlay "30" at 61.6,17.98 h1 r90; Top Overlay "32" at 59.06,17.98 h1 r90; Top Overlay "34" at 56.52,17.98 h1 r90; Top Overlay "36" at 53.98,17.98 h1 r90; Top Overlay "38" at 51.44,17.98 h1 r90; Top Overlay "40" at 48.9,17.98 h1 r90; Top Overlay "42" at 46.36,17.98 h1 r90; Top Overlay "44" at 43.82,17.98 h1 r90; Top Overlay "46" at 41.28,17.98 h1 r90; Top Overlay "48" at 38.74,17.98 h1 r90; Top Overlay "50" at 36.2,17.98 h1 r90; Top Overlay "52" at 33.66,17.98 h1 r90; Top Overlay "6" at 27.5,43.46 h1; Top Overlay "15" at 27.5,18.06 h1; Top Overlay "A14" at 27.5,20.6 h1; Top Overlay "A13" at 27.5,23.14 h1; Top Overlay "A12" at 27.5,25.68 h1; Top Overlay "A11" at 27.5,28.22 h1; Top Overlay "A10" at 27.5,30.76 h1; Top Overlay "A9" at 27.5,33.3 h1; Top Overlay "A8" at 27.5,35.84 h1; Top Overlay "A7" at 27.5,40.92 h1; Top Overlay "A5" at 27.5,46 h1; Top Overlay "A4" at 27.5,48.54 h1; Top Overlay "A3" at 27.5,51.08 h1; Top Overlay "A2" at 27.5,53.62 h1; Top Overlay "A0" at 27.5,58.7 h1; Top Overlay "VIN" at 27.5,63.78 h1; Top Overlay "GND" at 28.57,67.527 h1; Top Overlay "5V" at 27.5,71.4 h1; Top Overlay "3.3V" at 27.5,73.94 h1; Top Overlay "RESET" at 27.5,76.48 h1; Top Overlay "IOREF" at 27.5,79.02 h1; Top Overlay "TX3" at 69.164,40.92 h1; Top Overlay "RX3" at 69.164,38.38 h1; Top Overlay "TX2" at 69.164,35.84 h1; Top Overlay "RX2" at 69.164,33.3 h1; Top Overlay "TX1" at 69.497,30.76 h1; Top Overlay "RX1" at 69.497,28.22 h1; Top Overlay "SDA" at 69.164,25.68 h1; Top Overlay "SCL" at 69.164,23.14 h1; Top Overlay "0" at 71.164,46 h1; Top Overlay "1" at 71.497,48.54 h1; Top Overlay "2" at 71.164,51.08 h1; Top Overlay "3" at 71.164,53.62 h1; Top Overlay "4" at 71.164,56.16 h1; Top Overlay "5" at 71.164,58.7 h1; Top Overlay "6" at 71.164,61.24 h1; Top Overlay "7" at 71.164,63.78 h1; Top Overlay "8" at 71.164,67.59 h1; Top Overlay "9" at 71.164,70.13 h1; Top Overlay "10" at 70.33,72.67 h1; Top Overlay "11" at 70.664,75.21 h1; Top Overlay "12" at 70.33,77.75 h1; Top Overlay "13" at 70.33,80.417 h1; Top Overlay "GND" at 69.164,82.83 h1; Top Overlay "AREF" at 68.165,85.37 h1; Top Overlay "1: MISO" at 56.22,89.42 h1; Top Overlay "5V :2" at 48.781,89.42 h1; Top Overlay "3: SCK" at 56.22,91.96 h1; Top Overlay "MOSI :4" at 46.949,91.96 h1; Top Overlay "5: RESET" at 56.22,94.5 h1; Top Overlay "GND :6" at 47.782,94.5 h1; Top Overlay "ATMEGA16U2" at 48.097,96.474 h1.52; Top Overlay "ICSP" at 52.667,86.922 h1.52; Top Overlay "ICSP" at 41.904,43.908 h1.52; Top Overlay "ATMEGA2560" at 41.376,53.485 h1.52; Top Overlay "SCL" at 61.291,86.64 h1; Top Overlay "SDA" at 61.291,84.1 h1; Top Overlay "50: MISO / 51: MOSI / 52: SCK / 53: SS" at 47.765,23.561 h1; Top Overlay "SPI Pins" at 46.37,31.754 h1.52; Top Overlay "TX" at 67.164,48.54 h1; Top Overlay "RX" at 67.164,46 h1